# EAGLE board PCB (EAGLE 9.7.0)
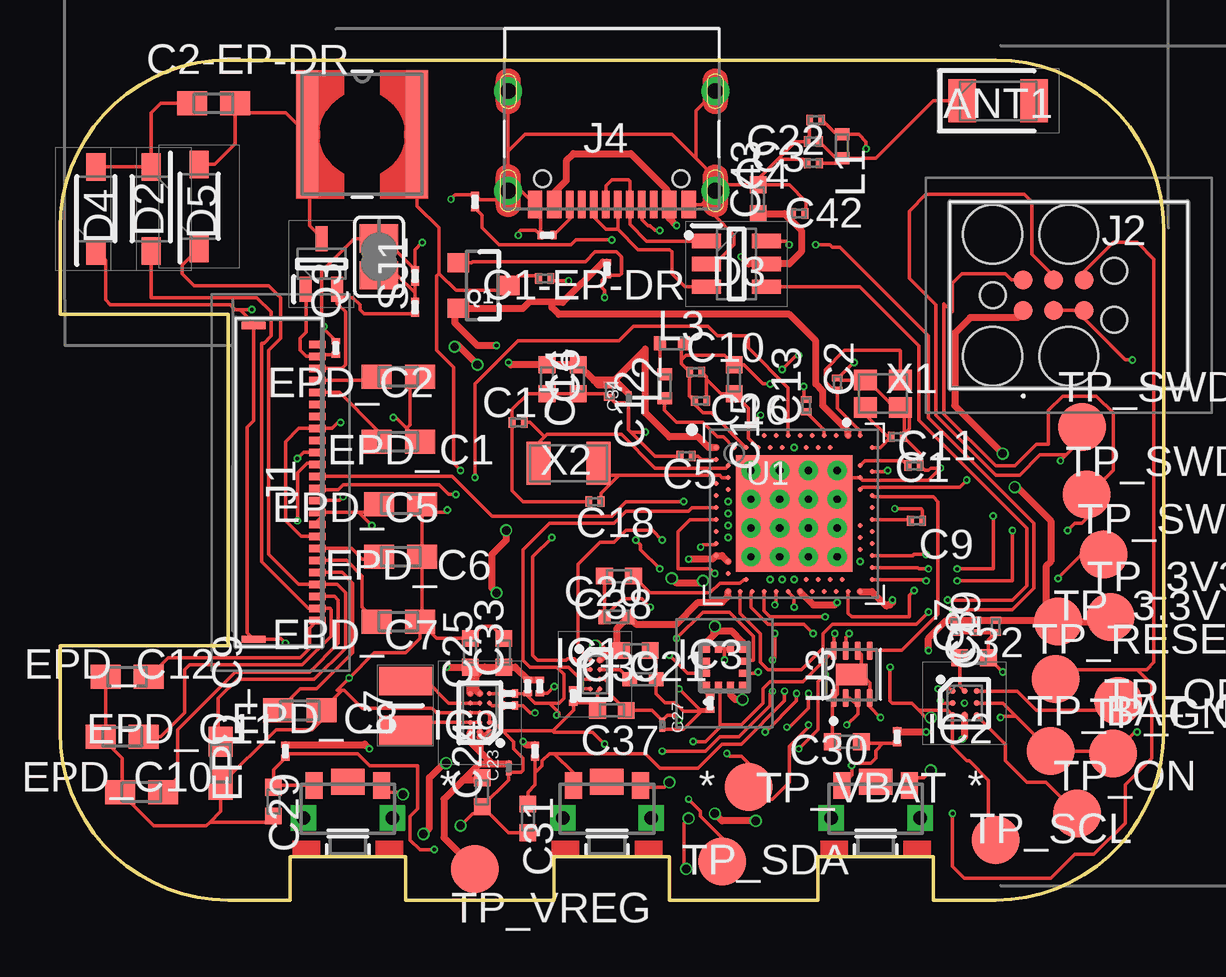
[diagram p0: board, top side]
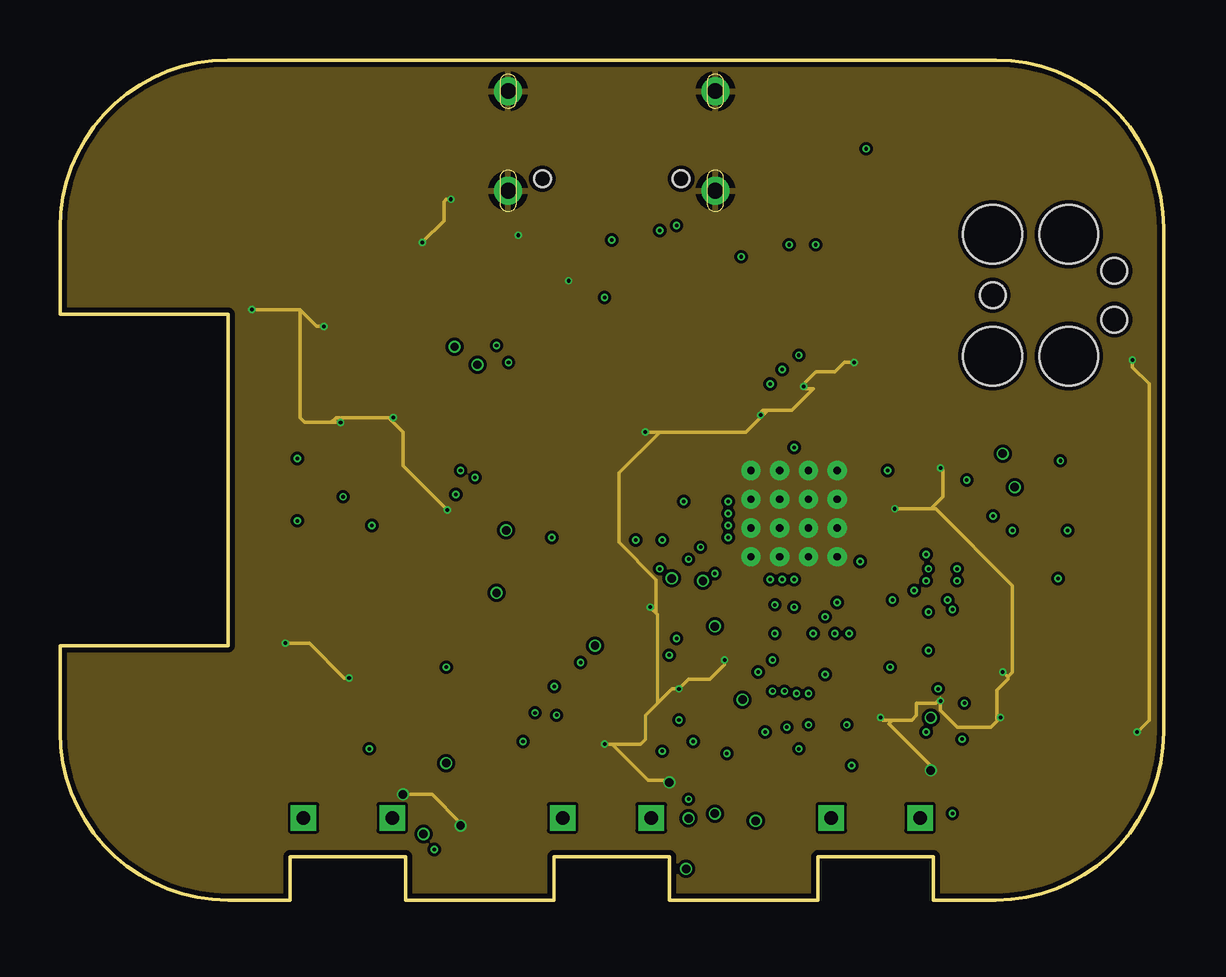
[diagram p1: board, inner layer Route2]
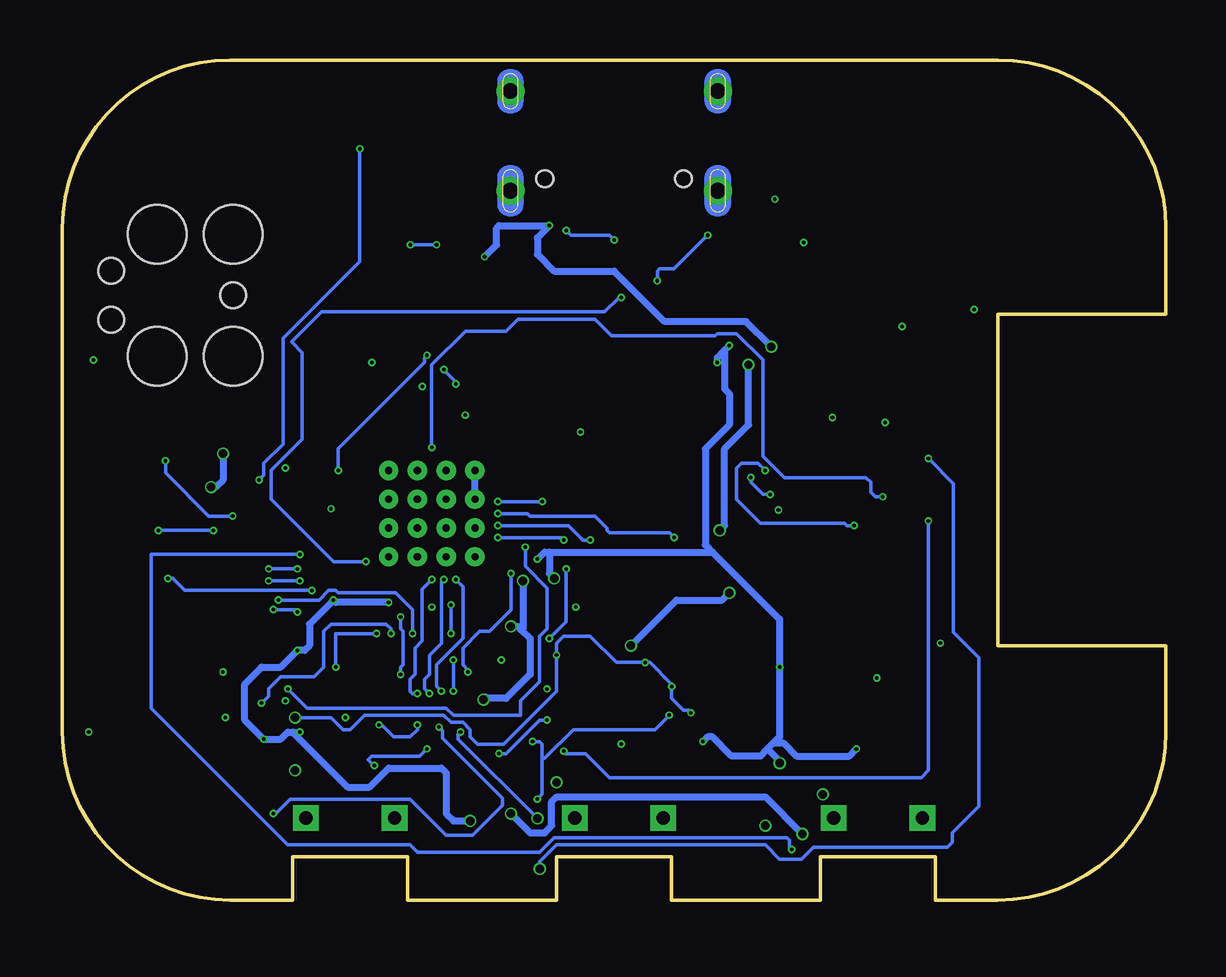
[diagram p2: board, bottom side, seen from below]

Size 46 x 35 mm. Coordinates in mm from the lower left corner, seen from the top.
Outline: 39,0 36.4,0 36.4,1.8 31.6,1.8 31.6,0 25.4,0 25.4,1.8 20.6,1.8 20.6,0 14.4,0 14.4,1.8 9.6,1.8 9.6,0 7,0 arc-90 0,7 0,10.6 7,10.6 7,24.4 0,24.4 0,28 arc-90 7,35 39,35 arc-90 46,28 46,7 arc-90 39,0
Copper layers (1+2*15+16): Top 0.035mm / dielectric 1.6mm / Route2 0.035mm / dielectric 0.15mm / Route15 0.035mm / dielectric 0.2mm / Bottom 0.035mm
Design rules "jlcpcb-2layers.dru *": minimum track width 5mil, minimum drill 0.15mm, track to track 5mil, track to pad 5mil, pad to pad 5mil, via to via 5mil, smd to smd 5mil, copper to edge 0.2mm, drill to drill 6mil, minimum pad ring 10mil, minimum via ring 3mil, stop-mask expansion 4mil, vias tented up to drill 0mil, thermal gap 10mil

## Footprints (pad centres in the part's own frame; a part is rotated, then mirrored left to right if it is on the bottom)
2450AT18B100E_ANTC3216X140N = smd 1.15 x 1.8: 1 -1.5,0; 2 1.5,0
NORDIC_NRF_3_RESC0201_L = smd 0.28 x 0.43: 1 -0.255,0; 2 0.255,0
NORDIC_NRF_3_RESC0603_M = smd 1.25 x 1: 1 -0.9,0; 2 0.9,0
NORDIC_NRF_3_RESC0402_M = smd 0.7 x 0.7: 1 -0.6,0; 2 0.6,0
GRM011R60J152KE01L_2_CAPC0201X13N = smd 0.22 x 0.23: 1 -0.185,0; 2 0.185,0
NORDIC_NRF_3_RESC0402_L = smd 0.5 x 0.6: 1 -0.5,0; 2 0.5,0
NORDIC_NRF_3_RESC0402_N = smd 0.6 x 0.6: 1 -0.55,0; 2 0.55,0
ESP32_C6_LIBRARY_5_SOD3716X135N = smd 1.15 x 0.8: 1 -1.75,0; 2 1.75,0
ESP32_C6_LIBRARY_3_SOT95P280X145-6N = smd 1.2 x 0.6: 1 -1.25,0.95; 2 -1.25,0; 3 -1.25,-0.95; 4 1.25,-0.95; 5 1.25,0; 6 1.25,0.95
BQ25180YBGR_BGA8C40P2X4_100X155X50 = smd 0.2 x 0.2: A1 -0.2,0.6; A2 0.2,0.6; B1 -0.2,0.2; B2 0.2,0.2; C1 -0.2,-0.2; C2 0.2,-0.2; D1 -0.2,-0.6; D2 0.2,-0.6
DRV2605YZFR_BGA9C50P3X3_144X144X62 = smd 0.25 x 0.25: A1 -0.5,0.5; A2 0,0.5; A3 0.5,0.5; B1 -0.5,0; B2 0,0; B3 0.5,0; C1 -0.5,-0.5; C2 0,-0.5; C3 0.5,-0.5
BMA423_BMA423 = smd 0.3 x 0.35: 1 -0.75,-0.775; 2 -0.25,-0.775; 3 0.25,-0.775; 4 0.75,-0.775; 7 0.75,0.775; 8 0.25,0.775; 9 -0.25,0.775; 10 -0.75,0.775 | smd 0.35 x 0.3: 5 0.775,-0.25; 6 0.775,0.25; 11 -0.775,0.25; 12 -0.775,-0.25
RT6160AWSC_BGA15C40P3X5_140X230X60 = smd 0.216 x 0.216: A1 -0.4,0.8; A2 0,0.8; A3 0.4,0.8; B1 -0.4,0.4; B2 0,0.4; B3 0.4,0.4; C1 -0.4,0; C2 0,0; C3 0.4,0; D1 -0.4,-0.4; D2 0,-0.4; D3 0.4,-0.4; E1 -0.4,-0.8; E2 0,-0.8; E3 0.4,-0.8
503480-2400_5034802400 = smd 0.3 x 0.7: 1 -5.75,1.525; 2 -5.25,1.525; 3 -4.75,1.525; 4 -4.25,1.525; 5 -3.75,1.525; 6 -3.25,1.525; 7 -2.75,1.525; 8 -2.25,1.525; 9 -1.75,1.525; 10 -1.25,1.525; 11 -0.75,1.525; 12 -0.25,1.525; 13 0.25,1.525; 14 0.75,1.525; 15 1.25,1.525; 16 1.75,1.525; 17 2.25,1.525; 18 2.75,1.525; 19 3.25,1.525; 20 3.75,1.525; 21 4.25,1.525; 22 4.75,1.525; 23 5.25,1.525; 24 5.75,1.525 | smd 0.3 x 1: MP1 -6.54,-1.125; MP2 6.54,-1.125
TC2030-IDC_TC2030IDC = smd 0.783 x 0.783: 1 -0.953,-0.635; 2 -0.953,0.635; 3 0.317,-0.635; 4 0.317,0.635; 5 1.588,-0.635; 6 1.588,0.635 | hole 2.451: -2.223,-2.54; -2.223,2.54; 0.952,-2.54; 0.952,2.54 | hole 1.067: -2.223,0; 2.857,-1.016; 2.857,1.016
KH-TYPE-C-16P_KINGHELM_KH-TYPE-C-16P = smd 0.6 x 1.15: A1_B12 -3.2,4.725; A4_B9 -2.4,4.725; A9_B4 2.4,4.725; A12_B1 3.2,4.725 | smd 0.3 x 1.15: A5 -1.25,4.725; A6 -0.25,4.725; A7 0.25,4.725; A8 1.25,4.725; B5 1.75,4.725; B6 0.75,4.725; B7 -0.75,4.725; B8 -1.75,4.725 | drill 0.65 pad 1.05: SH1 -4.32,0; SH2 4.32,0; SH3 -4.32,4.15; SH4 4.32,4.15 | hole 0.7: -2.89,3.65; 2.89,3.65
NORDIC_NRF_2_RESC0402_L = smd 0.5 x 0.6: 1 -0.5,0; 2 0.5,0
ESP32_C6_LIBRARY_2_IND_4828-WE-TPC_WRE = smd 0.9 x 5.3: 1 -2.286,0; 2 2.286,0
MLP2016SR47MT0S1_INDC2016X100N = smd 1.2 x 2.2: 1 -1.028,0; 2 1.028,0
ESP32_C6_LIBRARY_4_ESP32_C6_LIBRARY_4_ESP32_C6_LIBRARY_4_ESP32_C6_LIBRARY_4_ESP32_WROVER_SPARKFUN-DISCRETESEMI_SOT23-3 = smd 0.8 x 0.9: 1 -0.95,-1; 2 0.95,-1; 3 0,1.1
ESP32_C6_LIBRARY_6_SOT65P210X110-3N = smd 1.05 x 0.5: 1 -1.05,0.65; 2 -1.05,-0.65; 3 1.05,0
ERA-1AEB3401C_0201 = smd 0.35 x 0.25: 1 0,0.275; 2 0,-0.275
ESP32_C6_LIBRARY_7_JUMPER_SJ = smd 1.168 x 1.6: 1 -0.762,0; 2 0.762,0
2025-10-22_07-23-44_LIBRARY_SW_EVP-AKE31A_PAN = smd 0.711 x 1.092: 1 -1.4,-0.972; 2 1.4,-0.972 | drill 0.559 pad 0.914 square: 3 -1.848,0.381; 4 1.848,0.381 | smd 1.397 x 1.092: 5 0,-1.124
HECTOR_WATCH_1_TP20R = smd 2 x 2: TP 0,0
NORDIC_NRF_4_AQFN50P700X700X85_HS-74N = smd 4.85 x 4.85: P$74 0,0 | drill 0.3 pad 0.6: P$75 -1.8,1.8; P$76 -0.6,1.8; P$77 0.6,1.8; P$78 1.8,1.8; P$79 -1.8,0.6; P$80 -0.6,0.6; P$81 0.6,0.6; P$82 1.8,0.6; P$83 -1.8,-0.6; P$84 -0.6,-0.6; P$85 0.6,-0.6; P$86 1.8,-0.6; P$87 -1.8,-1.8; P$88 -0.6,-1.8; P$89 0.6,-1.8; P$90 1.8,-1.8 | smd 0.2 x 0.2: P$A8 -1.25,3.25; P$A10 -0.75,3.25; P$A12 -0.25,3.25; P$A14 0.25,3.25; P$A16 0.75,3.25; P$A18 1.25,3.25; P$A20 1.75,3.25; P$A22 2.25,3.25; P$A23 2.75,3.25; P$AA24 3.25,-2.25; P$AB2 -2.75,-2.5; P$AC5 -2,-2.75; P$AC9 -1,-2.75; P$AC11 -0.5,-2.75; P$AC13 0,-2.75; P$AC15 0.5,-2.75; P$AC17 1,-2.75; P$AC19 1.5,-2.75; P$AC21 2,-2.75; P$AC24 3.25,-2.75; P$AD2 -2.75,-3.25; P$AD4 -2.25,-3.25; P$AD6 -1.75,-3.25; P$AD8 -1.25,-3.25; P$AD10 -0.75,-3.25; P$AD12 -0.25,-3.25; P$AD14 0.25,-3.25; P$AD16 0.75,-3.25; P$AD18 1.25,-3.25; P$AD20 1.75,-3.25; P$AD22 2.25,-3.25; P$AD23 2.75,-3.25; P$B1 -3.25,2.75; P$B3 -2.5,2.75; P$B5 -2,2.75; P$B7 -1.5,2.75; P$B9 -1,2.75; P$B11 -0.5,2.75; P$B13 0,2.75; P$B15 0.5,2.75; P$B17 1,2.75; P$B19 1.5,2.75; P$B24 3.25,2.75; P$C1 -3.25,2.25; P$D2 -2.75,2; P$D23 2.75,2; P$E24 3.25,1.75; P$F2 -2.75,1.5; P$F23 2.75,1.5; P$G1 -3.25,1.25; P$H2 -2.75,1; P$H23 2.75,1; P$J1 -3.25,0.75; P$J24 3.25,0.75; P$K2 -2.75,0.5; P$L1 -3.25,0.25; P$L24 3.25,0.25; P$M2 -2.75,0; P$N1 -3.25,-0.25; P$N24 3.25,-0.25; P$P2 -2.75,-0.5; P$P23 2.75,-0.5; P$R1 -3.25,-0.75; P$R24 3.25,-0.75; P$T2 -2.75,-1; P$T23 2.75,-1; P$U1 -3.25,-1.25; P$U24 3.25,-1.25; P$V23 2.75,-1.5; P$W1 -3.25,-1.75; P$W24 3.25,-1.75; P$Y2 -2.75,-2; P$Y23 2.75,-2
ESP32_C6_LIBRARY_SON50P200X200X80-9N = smd 0.76 x 0.27: 1 -0.985,0.75; 2 -0.985,0.25; 3 -0.985,-0.25; 4 -0.985,-0.75; 5 0.985,-0.75; 6 0.985,-0.25; 7 0.985,0.25; 8 0.985,0.75 | smd 0.9 x 1.3: 9 0,0
NORDIC_NRF_BT-XTAL_2016_N = smd 0.95 x 0.85: 1 -0.725,-0.575; 2 0.725,-0.575; 3 0.725,0.575; 4 -0.725,0.575
NORDIC_NRF_1_XTAL_3215_N = smd 1 x 1.8: 1 -1.25,0; 2 1.25,0

## Placement (x,y rotation side)
ANT1  2450AT18B100E  [2450AT18B100E_ANTC3216X140N]  39.1,33.3 0 top
C1  12pF  [NORDIC_NRF_3_RESC0201_L]  34.9,19.3 0 top
C1-EP-DR  10uF  [NORDIC_NRF_3_RESC0201_L]  20.2,25.9 0 top
C2  12pF  [NORDIC_NRF_3_RESC0201_L]  32.4,21.5 90 top
C2-EP-DR  4.7uF/25V  [NORDIC_NRF_3_RESC0603_M]  6.4,33.2 0 top
C3  1pF  [NORDIC_NRF_3_RESC0201_L]  31.5,32.5 180 top
C4  1pF  [NORDIC_NRF_3_RESC0201_L]  31.4,30.7 180 top
C5  100nF  [NORDIC_NRF_3_RESC0201_L]  26.1,18.5 180 top
C6  4.7uF  [NORDIC_NRF_3_RESC0402_M]  20.3,21.7 270 top
C7  100nF  [NORDIC_NRF_3_RESC0201_L]  37.3,11.4 270 top
C8  100nF  [NORDIC_NRF_3_RESC0201_L]  39,11.4 270 top
C9  820pF  [NORDIC_NRF_3_RESC0201_L]  35.7,15.8 0 top
C10  N.C.  [NORDIC_NRF_3_RESC0201_L]  26.5,22 0 top
C11  100pF  [NORDIC_NRF_3_RESC0201_L]  35.6,18.1 0 top
C12  100nF  [NORDIC_NRF_3_RESC0201_L]  22.9,21.2 270 top
C13  N.C.  [NORDIC_NRF_3_RESC0201_L]  31.1,20.6 90 top
C14  4.7uF  [NORDIC_NRF_3_RESC0402_M]  21.6,21.7 270 top
C15  1.0uF  [NORDIC_NRF_3_RESC0402_M]  28.1,21.7 270 top
C16  47nF  [NORDIC_NRF_3_RESC0201_L]  26.7,20.8 0 top
C17  12pF  [NORDIC_NRF_3_RESC0201_L]  19.1,19.9 0 top
C18  12pF  [NORDIC_NRF_3_RESC0201_L]  22.3,16.6 0 top
C19  100nF  [NORDIC_NRF_3_RESC0201_L]  38.2,11.4 270 top
C20  4.7uF  [NORDIC_NRF_3_RESC0402_M]  23.3,13.5 180 top
C21  4.7uF  [NORDIC_NRF_3_RESC0402_M]  24,10.4 0 top
C22  N.C.  [NORDIC_NRF_3_RESC0201_L]  31.4,31.6 180 top
C23  0.1uF  [GRM011R60J152KE01L_2_CAPC0201X13N]  18.7,5.5 90 top
C24  10uF  [NORDIC_NRF_3_RESC0402_M]  17.6,4.5 90 top
C25  22uF  [NORDIC_NRF_3_RESC0402_M]  17.1,10.3 90 top
C27  0.1uF  [GRM011R60J152KE01L_2_CAPC0201X13N]  25.1,7.3 90 top
C29  1uF  [NORDIC_NRF_3_RESC0402_M]  8.9,4.1 270 top
C30  1uF  [NORDIC_NRF_3_RESC0402_M]  32.8,6.6 180 top
C31  1uF  [NORDIC_NRF_3_RESC0402_M]  19.5,3.4 270 top
C32  1uF  [NORDIC_NRF_3_RESC0402_M]  38.1,10.1 0 top
C33  22uF  [NORDIC_NRF_3_RESC0402_M]  18.5,10.3 90 top
C34  0.1uF  [GRM011R60J152KE01L_2_CAPC0201X13N]  23.7,20.9 90 top
C37  1uF  [NORDIC_NRF_3_RESC0402_M]  23,7.9 180 top
C38  1uF  [NORDIC_NRF_3_RESC0402_L]  23.2,11.8 0 top
C39  10uF  [NORDIC_NRF_3_RESC0402_N]  24.3,9.2 0 top
C42  0.1uF  [NORDIC_NRF_3_RESC0201_L]  30.8,28.6 0 top
C43  4.7uF  [NORDIC_NRF_3_RESC0402_M]  29.1,29.2 90 top
D2  MBR0530  [ESP32_C6_LIBRARY_5_SOD3716X135N]  3.8,28.8 270 top
D3  USBLC6-2SC6Y  [ESP32_C6_LIBRARY_3_SOT95P280X145-6N]  28.2,26.5 0 top
D4  MBR0530  [ESP32_C6_LIBRARY_5_SOD3716X135N]  1.5,28.8 90 top
D5  MBR0530  [ESP32_C6_LIBRARY_5_SOD3716X135N]  5.8,28.9 90 top
EPD_C1  1uF/50V  [NORDIC_NRF_3_RESC0603_M]  14.1,19.1 180 top
EPD_C2  1uF/50V  [NORDIC_NRF_3_RESC0603_M]  14.1,21.8 180 top
EPD_C5  01.uF/50V  [NORDIC_NRF_3_RESC0603_M]  14.2,16.5 180 top
EPD_C6  1uF/50V  [NORDIC_NRF_3_RESC0603_M]  14.2,14.3 180 top
EPD_C7  1uF/50V  [NORDIC_NRF_3_RESC0603_M]  14.1,11.6 180 top
EPD_C8  1uF/50V  [NORDIC_NRF_3_RESC0603_M]  10,7.9 180 top
EPD_C9  1uF/50V  [NORDIC_NRF_3_RESC0603_M]  6.7,5.7 90 top
EPD_C10  1uF/50V  [NORDIC_NRF_3_RESC0603_M]  3.4,4.5 0 top
EPD_C11  1uF/50V  [NORDIC_NRF_3_RESC0603_M]  2.6,6.8 0 top
EPD_C12  1uF/50V  [NORDIC_NRF_3_RESC0603_M]  2.8,9.3 0 top
IC1  BQ25180YBGR  [BQ25180YBGR_BGA8C40P2X4_100X155X50]  22.3,9.4 0 top
IC2  DRV2605YZFR  [DRV2605YZFR_BGA9C50P3X3_144X144X62]  37.7,8.2 0 top
IC3  BMA421  [BMA423_BMA423]  27.7,9.7 0 top
IC9  RT6160AWSC  [RT6160AWSC_BGA15C40P3X5_140X230X60]  17.5,7.8 180 top
J1  503480-2400  [503480-2400_5034802400]  9.2,17.4 270 top
J2  TC2030-IDC  [TC2030-IDC_TC2030IDC]  41.1,25.2 0 top
J4  KH-TYPE-C-16P  [KH-TYPE-C-16P_KINGHELM_KH-TYPE-C-16P]  23,33.7 180 top
L1  3.9nH  [NORDIC_NRF_2_RESC0402_L]  32.6,31.4 270 top
L2  100µH  [NORDIC_NRF_2_RESC0402_L]  25.2,21.4 90 top
L3  15nH  [NORDIC_NRF_2_RESC0402_L]  25.5,23.2 0 top
L5  68uH  [ESP32_C6_LIBRARY_2_IND_4828-WE-TPC_WRE]  12.6,31.9 0 top
L7  FTC252012SR47MBCA  [MLP2016SR47MT0S1_INDC2016X100N]  14.4,8.1 90 top
Q1  20V/4.2A/52mΩ/1.4W  [ESP32_C6_LIBRARY_4_ESP32_C6_LIBRARY_4_ESP32_C6_LIBRARY_4_ESP32_C6_LIBRARY_4_ESP32_WROVER_SPARKFUN-DISCRETESEMI_SOT23-3]  17.6,25.6 270 top
Q3  SI1308EDL-T1-GE3  [ESP32_C6_LIBRARY_6_SOT65P210X110-3N]  10.9,26.5 90 top
R1-EP-DR  0.47  [ERA-1AEB3401C_0201]  14.8,24.7 0 top
R1_USB  5K1  [ERA-1AEB3401C_0201]  17.3,29.1 0 top
R2  0  [ERA-1AEB3401C_0201]  18.7,8.6 270 top
R2-EP-DR  10K  [ERA-1AEB3401C_0201]  11.5,23 0 top
R2_USB  5K1  [ERA-1AEB3401C_0201]  20.3,27.7 270 top
R3  0  [ERA-1AEB3401C_0201]  27.1,8.2 180 top
R4  0  [ERA-1AEB3401C_0201]  18.7,8.1 270 top
R5  10K  [ERA-1AEB3401C_0201]  34.9,6.8 180 top
R7  10K  [ERA-1AEB3401C_0201]  9.4,6.2 180 top
R8  10K  [ERA-1AEB3401C_0201]  19.8,6.2 180 top
R9  10K  [ERA-1AEB3401C_0201]  21.4,8.5 180 top
R17  3K3  [ERA-1AEB3401C_0201]  20,8.9 0 top
R18  3K3  [ERA-1AEB3401C_0201]  19.5,8.9 0 top
R_PWR_EPD  10K  [ERA-1AEB3401C_0201]  22.8,26.3 180 top
R_TYPE_SEL  2.2  [ERA-1AEB3401C_0201]  14.8,26 0 top
SJ1  [ESP32_C6_LIBRARY_7_JUMPER_SJ]  13.3,26.8 270 top
SW_DN  2025-10-22_07-23-44_LIBRARY_EVP-AKE31ASW_EVP-AKE31A_PAN  [2025-10-22_07-23-44_LIBRARY_SW_EVP-AKE31A_PAN]  12,3.8 180 top
SW_NET  2025-10-22_07-23-44_LIBRARY_EVP-AKE31ASW_EVP-AKE31A_PAN  [2025-10-22_07-23-44_LIBRARY_SW_EVP-AKE31A_PAN]  22.8,3.8 180 top
SW_UP  2025-10-22_07-23-44_LIBRARY_EVP-AKE31ASW_EVP-AKE31A_PAN  [2025-10-22_07-23-44_LIBRARY_SW_EVP-AKE31A_PAN]  34,3.8 180 top
TP_3.3V  HECTOR_WATCH_1_TPTP20R  [HECTOR_WATCH_1_TP20R]  41.6,11.6 0 top
TP_3V3  HECTOR_WATCH_1_TPTP20R  [HECTOR_WATCH_1_TP20R]  43.8,11.8 0 top
TP_BAT_GND  HECTOR_WATCH_1_TPTP20R  [HECTOR_WATCH_1_TP20R]  41.3,6.2 0 top
TP_GND  HECTOR_WATCH_1_TPTP20R  [HECTOR_WATCH_1_TP20R]  43.9,6.1 0 top
TP_ON  HECTOR_WATCH_1_TPTP20R  [HECTOR_WATCH_1_TP20R]  42.4,3.6 0 top
TP_OP  HECTOR_WATCH_1_TPTP20R  [HECTOR_WATCH_1_TP20R]  44.1,8.3 0 top
TP_RESET  HECTOR_WATCH_1_TPTP20R  [HECTOR_WATCH_1_TP20R]  41.5,9.2 0 top
TP_SCL  HECTOR_WATCH_1_TPTP20R  [HECTOR_WATCH_1_TP20R]  39,2.5 0 top
TP_SDA  HECTOR_WATCH_1_TPTP20R  [HECTOR_WATCH_1_TP20R]  27.6,1.6 0 top
TP_SWDCLK  HECTOR_WATCH_1_TPTP20R  [HECTOR_WATCH_1_TP20R]  42.6,19.7 0 top
TP_SWDIO  HECTOR_WATCH_1_TPTP20R  [HECTOR_WATCH_1_TP20R]  42.8,16.9 0 top
TP_SWO  HECTOR_WATCH_1_TPTP20R  [HECTOR_WATCH_1_TP20R]  43.5,14.4 0 top
TP_VBAT  HECTOR_WATCH_1_TPTP20R  [HECTOR_WATCH_1_TP20R]  28.7,4.7 0 top
TP_VREG  HECTOR_WATCH_1_TPTP20R  [HECTOR_WATCH_1_TP20R]  17.3,1.3 0 top
U1  NRF52840_QF  [NORDIC_NRF_4_AQFN50P700X700X85_HS-74N]  30.6,16.1 0 top
U3  MAX17048G+T10  [ESP32_C6_LIBRARY_SON50P200X200X80-9N]  33,9.4 90 top
X1  32MHz  [NORDIC_NRF_BT-XTAL_2016_N]  34.3,21.1 0 top
X2  32.768kHz  [NORDIC_NRF_1_XTAL_3215_N]  21.2,18.2 0 top

## Library data of the parts
ANT1 = InkTime_v5; ARROW_PART_NUMBER: 2450AT18B100E; ARROW_PRICE-STOCK: https://www.arrow.com/en/products/2450at18b100e/johanson-dielectrics?utm_currency=USD&region=nac; DESCRIPTION: Antennas 2.45GHz ANTENNA; HEIGHT: 1.4mm; MANUFACTURER_NAME: JOHANSON TECHNOLOGY; MANUFACTURER_PART_NUMBER: 2450AT18B100E; MOUSER_PART_NUMBER: 609-2450AT18B100E; MOUSER_PRICE-STOCK: https://www.mouser.co.uk/ProductDetail/Johanson-Technology/2450AT18B100E?qs=yCnrNFeXz%252Bh5MFsFIXGZGA%3D%3D
C1 C1-EP-DR C2 C2-EP-DR C3-C8 C10-C22 C24 C25 C29-C33 C37-C39 C42 C43 EPD_C1 EPD_C2 EPD_C5-EPD_C12 L1-L3 R1-EP-DR R1_USB R2 R2-EP-DR R2_USB R3-R5 R7-R9 R17 R18 R_PWR_EPD R_TYPE_SEL SJ1 TP_3.3V TP_3V3 TP_BAT_GND TP_GND TP_ON TP_OP TP_RESET TP_SCL TP_SDA TP_SWDCLK TP_SWDIO TP_SWO TP_VBAT TP_VREG U1 X1 X2 = InkTime_v5
C9 = InkTime_v5; MAXTEMP: N.C.
C23 C27 C34 = InkTime_v5; AVAILABILITY: In Stock; CHECK_PRICES: https://www.snapeda.com/parts/GRM011R60J152KE01L/Murata/view-part/?ref=eda; DESCRIPTION: SMD Capacitor X5R(EIA) with Capacitance: 1500pF Tol. 10%. Rated Voltage: 6.3Vdc; MF: Murata; MP: GRM011R60J152KE01L; PACKAGE: 0201 Murata; PRICE: None; SNAPEDA_LINK: https://www.snapeda.com/parts/GRM011R60J152KE01L/Murata/view-part/?ref=snap
D2 D4 D5 = InkTime_v5; AVAILABILITY: In Stock; CHECK_PRICES: https://www.snapeda.com/parts/MBR0530/Onsemi/view-part/?ref=eda; DESCRIPTION: Diode Schottky 30 V 500mA Surface Mount SOD-123; MF: ON Semiconductor; MP: MBR0530; PACKAGE: SOD-123-2 ON Semiconductor; PRICE: None; PURCHASE-URL: https://www.snapeda.com/api/url_track_click_mouser/?unipart_id=179458&manufacturer=ON Semiconductor&part_name=MBR0530&search_term=None; SNAPEDA_LINK: https://www.snapeda.com/parts/MBR0530/Onsemi/view-part/?ref=snap
D3 = InkTime_v5; AVAILABILITY: In Stock; CHECK_PRICES: https://www.snapeda.com/parts/USBLC6-2SC6Y/STMicroelectronics/view-part/?ref=eda; DESCRIPTION: 17V Clamp 5A (8/20µs) Ipp Tvs Diode Surface Mount SOT-23-6; MF: STMicroelectronics; MP: USBLC6-2SC6Y; PACKAGE: SOT-23-6 STMicroelectronics; PRICE: None; SNAPEDA_LINK: https://www.snapeda.com/parts/USBLC6-2SC6Y/STMicroelectronics/view-part/?ref=snap
IC1 = InkTime_v5; ARROW_PART_NUMBER: BQ25180YBGR; ARROW_PRICE-STOCK: https://www.arrow.com/en/products/bq25180ybgr/texas-instruments?utm_currency=USD&region=nac; DESCRIPTION: Charger IC Lithium Ion/Polymer, Lithium Iron Phosphate 8-DSBGA (1.6x1.1); HEIGHT: 0.5mm; MANUFACTURER_NAME: Texas Instruments; MANUFACTURER_PART_NUMBER: BQ25180YBGR; MOUSER_PART_NUMBER: 595-BQ25180YBGR; MOUSER_PRICE-STOCK: https://www.mouser.co.uk/ProductDetail/Texas-Instruments/BQ25180YBGR?qs=doiCPypUmgEWjAK%252BJAX6Tw%3D%3D
IC2 = InkTime_v5; ARROW_PART_NUMBER: DRV2605YZFR; ARROW_PRICE-STOCK: https://www.arrow.com/en/products/drv2605yzfr/texas-instruments?region=nac; DESCRIPTION: Haptic Driver for ERM/LRA with Built-In Library and Smart Loop Architecture; HEIGHT: 0.625mm; MANUFACTURER_NAME: Texas Instruments; MANUFACTURER_PART_NUMBER: DRV2605YZFR
IC3 = InkTime_v5; ARROW_PART_NUMBER: BMA423; ARROW_PRICE-STOCK: https://www.arrow.com/en/products/bma423/bosch; DESCRIPTION: Accelerometers Triaxial low-g 12bit Acceleration Sensor; HEIGHT: 1mm; MANUFACTURER_NAME: BOSCH; MANUFACTURER_PART_NUMBER: BMA423; MOUSER_PART_NUMBER: 262-BMA423; MOUSER_PRICE-STOCK: https://www.mouser.co.uk/ProductDetail/Bosch-Sensortec/BMA423?qs=HXFqYaX1Q2xC%252BSgeGoX3mg%3D%3D
IC9 = InkTime_v5; DESCRIPTION: Buck-Boost Regulator Positive Output Step-Up/Step-Down I2C DC-DC Controller IC 15-WL-CSP (BSC) (1.4x2.3); HEIGHT: 0.6mm; MANUFACTURER_NAME: RICHTEK; MANUFACTURER_PART_NUMBER: RT6160AWSC; MOUSER_PART_NUMBER: 835-RT6160AWSC; MOUSER_PRICE-STOCK: https://www.mouser.co.uk/ProductDetail/Richtek/RT6160AWSC?qs=amGC7iS6iy%2FLd9PSoixZXQ%3D%3D
J1 = InkTime_v5; DESCRIPTION: FFC & FPC Connectors 0.5mm FPC RA SMT Dual Contact 24Ckt; HEIGHT: 1.87mm; MANUFACTURER_NAME: Molex; MANUFACTURER_PART_NUMBER: 503480-2400; MOUSER_PART_NUMBER: 538-503480-2400; MOUSER_PRICE-STOCK: https://www.mouser.co.uk/ProductDetail/Molex/503480-2400?qs=OAhjpuo3Vu7efIoxFh9AOw%3D%3D
J2 = InkTime_v5; DESCRIPTION: CABLE ADAPTER 6 POS; HEIGHT: 19mm; MANUFACTURER_NAME: Tag Connect; MANUFACTURER_PART_NUMBER: TC2030-IDC
J4 = InkTime_v5; AVAILABILITY: Not in stock; CHECK_PRICES: https://www.snapeda.com/parts/KH-TYPE-C-16P/Kinghelm/view-part/?ref=eda; MF: kinghelm; MP: KH-TYPE-C-16P; PACKAGE: None; PRICE: None; SNAPEDA_LINK: https://www.snapeda.com/parts/KH-TYPE-C-16P/Kinghelm/view-part/?ref=snap
L5 = InkTime_v5; COPYRIGHT: Copyright (C) 2024 Ultra Librarian. All rights reserved.; MANUFACTURER_PART_NUMBER: 744043680; MFR_NAME: Wurth Electronics
L7 = InkTime_v5; DESCRIPTION: SMD / SMT Inductors (Coils), L=0.47?H, L x W x T :; HEIGHT: 1mm; JLCPCB: https://jlcpcb.com/partdetail/6763488-FTC252012SR47MBCA/C5832368; MANUFACTURER_NAME: TDK; MANUFACTURER_PART_NUMBER: FTC252012SR47MBCA
Q1 = InkTime_v5; DMG2305UX-7: 0; PROD_ID: TRAN-14388
Q3 = InkTime_v5; AVAILABILITY: In Stock; CHECK_PRICES: https://www.snapeda.com/parts/SI1308EDL-T1-GE3/Vishay+Siliconix/view-part/?ref=eda; DESCRIPTION: Si1308EDL-T1-GE3 N-channel MOSFET Transistor, 1.5 A, 30 V, 3-Pin SC-70 | Siliconix / Vishay SI1308EDL-T1-GE3; MF: Vishay Siliconix; MP: SI1308EDL-T1-GE3; PACKAGE: SOT-323 Vishay Semiconductor; PRICE: None; PURCHASE-URL: https://www.snapeda.com/api/url_track_click_mouser/?unipart_id=274603&manufacturer=Vishay Siliconix&part_name=SI1308EDL-T1-GE3&search_term=None; SNAPEDA_LINK: https://www.snapeda.com/parts/SI1308EDL-T1-GE3/Vishay+Siliconix/view-part/?ref=snap
SW_DN SW_NET SW_UP = InkTime_v5_new; COPYRIGHT: Copyright (C) 2025 Ultra Librarian. All rights reserved.; DIGI-KEY_PART_NUMBER_1: P123437TR-ND; DIGI-KEY_PART_NUMBER_2: P123437CT-ND; DIGI-KEY_PART_NUMBER_3: P123437DKR-ND; MANUFACTURER_NAME: Panasonic; MANUFACTURER_PART_NUMBER: EVP-AKE31A
U3 = InkTime_v5; AVAILABILITY: In Stock; CHECK_PRICES: https://www.snapeda.com/parts/MAX17048G+T10/Analog+Devices/view-part/?ref=eda; DESCRIPTION: 3µA 1-Cell/2-Cell Fuel Gauge with ModelGauge; MF: Analog Devices; MP: MAX17048G+T10; PACKAGE: TDFN-8 Maxim; PRICE: None; PURCHASE-URL: https://www.snapeda.com/api/url_track_click_mouser/?unipart_id=329239&manufacturer=Analog Devices&part_name=MAX17048G+T10&search_term=None; SNAPEDA_LINK: https://www.snapeda.com/parts/MAX17048G+T10/Analog+Devices/view-part/?ref=snap

## Nets
3V3: C6.1 C7.1 C8.1 C12.1 C14.1 C19.1 C25.1 C33.1 C34.2 IC2.C2 IC3.3 IC3.7 IC3.10 IC9.E2 IC9.E3 J2.1 Q1.2 R5.2 R7.2 R8.2 R17.1 R18.1 R_PWR_EPD.2 TP_3.3V.TP TP_3V3.TP U1.P$A22 U1.P$AD14 U1.P$AD23 U1.P$B1 U1.P$W1 U1.P$Y2
ALERT: U1.P$J24 U3.5
D+: D3.4 U1.P$AD6
D-: D3.6 U1.P$AD4
DN: D3.1 J4.A7 J4.B7
DP: D3.3 J4.A6 J4.B6
EPD_3V3: C1-EP-DR.1 EPD_C5.2 J1.15 J1.16 L5.2 Q1.3
EPD_BUSY: J1.9
EPD_CS: J1.12 U1.P$K2
EPD_DC: J1.11 U1.P$AD10
EPD_RST: J1.10 U1.P$AC11
EPS_BUSY: U1.P$AD12
GDR: J1.2 Q3.1 R2-EP-DR.2
GND: C1-EP-DR.2 C1.2 C2.2 C3.2 C4.2 C5.2 C6.2 C7.2 C8.2 C9.2 C10.2 C11.2 C12.2 C13.2 C14.2 C15.2 C16.2 C17.1 C18.1 C19.2 C20.2 C21.2 C22.2 C23.1 C24.1 C25.2 C27.1 C29.2 C30.2 C31.2 C32.2 C33.2 C34.1 C37.2 C38.1 C39.2 C42.2 C43.2 D3.2 D4.1 EPD_C1.1 EPD_C2.1 EPD_C5.1 EPD_C6.1 EPD_C7.1 EPD_C8.1 EPD_C9.1 EPD_C10.1 EPD_C11.1 EPD_C12.1 IC1.D2 IC2.B1 IC2.B3 IC3.8 IC3.9 IC9.B1 IC9.C1 IC9.C2 IC9.C3 J1.8 J1.17 J1.MP1 J1.MP2 J2.3 J2.5 J4.A1_B12 J4.A12_B1 J4.SH1 J4.SH2 J4.SH3 J4.SH4 R1_USB.1 R2-EP-DR.1 R2_USB.2 R3.1 R9.1 R_TYPE_SEL.1 SJ1.1 SW_DN.1 SW_NET.1 SW_UP.1 TP_BAT_GND.TP TP_GND.TP U1.P$74 U1.P$75 U1.P$76 U1.P$77 U1.P$78 U1.P$79 U1.P$80 U1.P$81 U1.P$82 U1.P$83 U1.P$84 U1.P$85 U1.P$86 U1.P$87 U1.P$88 U1.P$89 U1.P$90 U1.P$B7 U1.P$F23 U3.1 U3.4 U3.6 U3.9 X1.2 X1.4
HAPTIC_EN: IC2.A1 U1.P$U1
IMU_INT1: IC3.5 U1.P$N1
IMU_INT2: IC3.6 U1.P$P2
LX1: IC9.B2 IC9.B3 L7.1
LX2: IC9.D2 IC9.D3 L7.2
MOSI: J1.14 U1.P$B13
N$1: C39.1 IC1.B2
N$2: C5.1 U1.P$C1
N$3: IC9.D1 R4.2
N$4: IC9.E1 R2.2
N$5: C17.2 U1.P$D2 X2.1
N$6: IC1.D1 R9.2
N$7: ANT1.1 C4.1 C22.1 L1.2
N$8: EPD_C8.2 J1.20
N$9: L2.1 U1.P$B3
N$10: IC3.1 R3.2
N$11: C10.1 C15.1 C16.1 L3.2 U1.P$B5 U1.P$E24
N$12: L2.2 L3.1
N$13: C18.2 U1.P$F2 X2.2
N$14: C2-EP-DR.2 D5.2 L5.1 Q3.3
N$15: C2-EP-DR.1 D2.1 D4.2
N$16: EPD_C2.2 J1.4
N$17: R1-EP-DR.1 R_TYPE_SEL.2 SJ1.2
N$18: EPD_C12.2 J1.24
N$19: C9.1 U1.P$N24
N$20: EPD_C1.2 J1.5
N$21: C20.1 U1.P$AC5
N$22: J4.A5 R1_USB.2
N$23: C3.1 L1.1 U1.P$H23
N$25: EPD_C10.2 J1.22
N$26: C11.1 U1.P$D23
N$27: C1.1 U1.P$B24 X1.1
N$28: C2.1 U1.P$A23 X1.3
N$29: C32.1 IC2.A2
N$31: C13.1 U1.P$A18
N$34: J4.B5 R2_USB.1
N$36: EPD_C6.2 J1.18
N$37: EPD_C7.2 J1.19
OUT+: IC2.A3 TP_OP.TP
OUT-: IC2.C3 TP_ON.TP
P0.04: U1.P$J1
P0.09: U1.P$L24
P0.13: C30.1 R5.1 SW_UP.2 U1.P$AD8
P0.14: C31.1 R8.1 SW_NET.2 U1.P$AC9
P0.19: U1.P$AC15
P0.20: U1.P$AD16
P0.21: U1.P$AC17
P0.22: U1.P$AD18
P0.23: U1.P$AC19
P0.24: U1.P$AD20
P0.25: U1.P$AC21
P0.26: U1.P$G1
P0.27: U1.P$H2
P0.28: U1.P$B11
P0.29: U1.P$A10
P0.30: U1.P$B9
P0.31: U1.P$A8
P1.01: Q1.1 R_PWR_EPD.1 U1.P$Y23
P1.02: C29.1 R7.1 SW_DN.2 U1.P$W24
P1.03: U1.P$V23
P1.04: U1.P$U24
P1.05: U1.P$T23
P1.06: U1.P$R24
P1.07: U1.P$P23
P1.09: U1.P$R1
P1.10: U1.P$A20
P1.11: U1.P$B19
P1.12: U1.P$B17
P1.13: U1.P$A16
P1.14: U1.P$B15
P1.15: U1.P$A14
PMIC_INT: IC1.A1 U1.P$T2
PREVGH: D5.1 EPD_C9.2 J1.21
PREVGL: D2.2 EPD_C11.2 J1.23
RESE: J1.3 Q3.2 R1-EP-DR.2
RESET: J2.6 TP_RESET.TP U1.P$AC13
SCK: J1.13 U1.P$A12
SCL: IC1.B1 IC2.C1 IC3.12 R4.1 R17.2 TP_SCL.TP U1.P$M2 U3.7
SDA: IC1.C1 IC2.B2 IC3.2 R2.1 R18.2 TP_SDA.TP U1.P$L1 U3.8
SWDCLK: J2.4 TP_SWDCLK.TP U1.P$AA24
SWDIO: J2.2 TP_SWDIO.TP U1.P$AC24
SWO: TP_SWO.TP U1.P$AD22
VBAT: C27.2 C37.1 IC1.C2 TP_VBAT.TP U3.2 U3.3
VBUS: C21.1 C38.2 C42.1 C43.1 D3.5 IC1.A2 J4.A4_B9 J4.A9_B4 U1.P$AD2
VREG: C23.2 C24.2 IC9.A1 IC9.A2 IC9.A3 TP_VREG.TP

## Tracks (layer width: path | path; a pad name or v marks a point on that pad's centre or on a via)
3V3  (via drill 0.15, 0.35)
  Top 0.3: U1.P$B1 27.05,18.85 26.6,19.3 25.4,19.3 24.4,20.3 24.4,22.96 C12.1 22.45,21.46 22.25,21.65 | 22.25,21.65 C14.1 C6.1 18.8,22.3 v18.7,22.4 | C34.2 23.13,21.65 22.25,21.65 | v18.2,23.1 17.4,23.1 16.45,24.05 16.45,24.5 Q1.2 19.3,24.65 19.58,24.93 20.5,24.91 | 20.5,24.91 20.95,24.9 22.62,26.58 R_PWR_EPD.2 | v26.2,14.2 27.2,14.2 U1.P$W1 27.6,14.35 U1.P$Y2 | v16.1,9.7 C25.1 17.7,9.7 | 17.7,9.7 C33.1 18.98,9.7 R18.1 R17.1 | 17.7,9.7 17.35,9.35 | 17.35,9.35 17.1,9.1 IC9.E3 | IC9.E2 17.35,8.75 17.35,9.35 | v19.3,6.6 19.43,6.48 R8.2 | R7.2 12.67,6.48 12.7,6.5 v12.9,6.3 | IC2.C2 37.7,6.8 v37.6,6.7 | v36.1,7 34.98,7 R5.2 | 41.55,11.66 C8.1 C19.1 C7.1 36.95,11.66 36.2,10.9 v36.2,10.4 | 41.55,11.66 TP_3.3V.TP 43.6,11.6 TP_3V3.TP | U1.P$AD23 33.85,12.85 34.45,12.25 34.5,12.3 34.6,12.3 34.7,12.4 v34.7,12.5 | U1.P$AD14 31.4,12.3 32.3,12.3 v32.4,12.4 | J2.1 40.15,24.47 39.95,24.27 37.95,24.27 37.3,23.62 37.3,20.6 v39.3,18.6 | v39.8,17.2 39.9,17.2 41.3,15.8 41.3,14.1 41.1,13.9 41.1,12.1 41.55,11.66 | U1.P$A22 32.85,19.55 31.8,20.6 31.8,21.2 31.5,21.5 31.5,23.3 30.4,24.4 20.8,24.4 20.5,24.7 20.5,24.91 | IC3.7 28.45,10.75 28,11.2 27.4,11.2 27.25,11.05 | 27.25,11.05 26.95,10.75 IC3.10 | 27.25,11.05 27.25,11.35 v27.3,11.4 | v28.45,8.35 28.15,8.35 27.95,8.55 IC3.3 | v25.5,13.4 25.7,13.2 26.7,13.2 v26.8,13.3 | v29,3.3 27.6,3.3 v27.3,3.6 | v15.15,2.75 15.4,3 15.4,5.1 16,5.7 v16.1,5.7
  Bottom 0.3: v18.7,22.4 18.7,22.6 18.4,22.9 | 18.4,22.9 v18.2,23.1 | v26.2,14.2 25.9,14.5 25.7,14.5 | 25.7,14.5 18.9,14.5 | 18.9,14.5 16.1,11.7 v16.1,9.7 16.1,6.8 16.35,6.55 | 16.35,6.55 16.6,6.3 | 16.6,6.3 16.9,6 18.1,6 18.9,6.8 19.1,6.8 v19.3,6.6 | 36.4,7 36.6,7 36.9,6.7 v37.6,6.7 38.4,7.5 38.4,9 37.7,9.7 36.9,9.7 v36.2,10.4 35.9,10.4 35.7,10.6 35.7,11.5 v34.7,12.5 34.6,12.4 v32.4,12.4 | 36.4,7 v36.1,7 | 16.35,6.55 15.95,6.55 15.4,6 13.2,6 v12.9,6.3 | v39.3,18.6 39.3,17.5 39.6,17.2 v39.8,17.2 | 18.4,22.9 18.4,21.3 18.2,21.1 18.2,19.8 19.2,18.8 19.2,14.8 18.9,14.5 | v27.3,11.4 27,11.4 26.85,11.25 | 26.85,11.25 26.5,10.9 26.5,9.4 27.5,8.4 28.3,8.4 28.35,8.45 v28.45,8.35 | 25.7,14.5 25.7,13.6 v25.5,13.4 | v26.8,13.3 26.8,11.3 26.85,11.25 | 36.4,7 34.1,4.7 33.2,4.7 32.4,5.5 30.2,5.5 30,5.3 30,3.6 29.7,3.3 v29,3.3 | v27.3,3.6 26.5,2.8 25.9,2.8 25.6,3.1 25.6,4.1 25.4,4.3 16.7,4.3 v15.15,2.75 | v16.1,5.7 16.1,5.8 16.6,6.3
ALERT
  Top 0.15: U1.P$J24 33.9,16.8 36.4,16.8 36.6,16.6 36.6,11.9 35.1,10.4 33.77,10.4 U3.5
D+  (via drill 0.15)
  Top 0.15: D3.4 33.35,25.55 35.8,23.1 35.8,20 40.3,15.5 40.3,13.1 39.7,12.5 v37,12.5 | v31.4,11.1 31,11.5 29.5,11.5 28.8,12.2 28.8,12.8 U1.P$AD6
  Bottom 0.15: v31.4,11.1 31.4,12.1 32.1,12.8 34.5,12.8 34.6,12.9 34.9,12.9 35.3,12.5 v37,12.5
D-  (via drill 0.15)
  Top 0.15: D3.6 30.25,27.45 v30.4,27.3 | U1.P$AD4 28.35,11.95 29.2,11.1 29.2,9.9 29.5,9.6 30.9,9.6 31.8,10.5 31.8,11.1 32.2,11.5 35.7,11.5 v36.2,12 | v37.2,12.1 39.7,12.1 40.6,13 40.6,15.7 36.2,20.1 36.2,23.5 32.5,27.2 32.2,27.2 32.1,27.3 v31.5,27.3
  Bottom 0.15: v30.4,27.3 v31.5,27.3 | v36.2,12 36.3,12.1 v37.2,12.1
DN
  Top 0.15: D3.1 24.45,27.45 23.75,28.15 J4.B7 23.75,29.95 23.7,30 23,30 22.75,29.75 J4.A7
DP
  Top 0.15: D3.3 26.05,25.55 25.5,26.1 25.5,27 25.4,27.1 24.1,27.1 23.25,27.95 | J4.A6 23.25,27.95 | 23.25,27.95 22.75,27.95 22.25,28.45 J4.B6
EPD_3V3  (via drill 0.15)
  Top 0.15: J1.15 11.1,16.15 | 11.1,16.15 12.45,16.15 | 12.45,16.15 12.95,16.15 EPD_C5.2 | J1.16 10.72,15.78 11.1,16.15 | L5.2 14.89,28.91 15.8,28 15.8,26.1 | 15.8,26.1 16.5,25.4 18.5,25.4 Q1.3 19.1,26 19.84,26 C1-EP-DR.1 | 15.8,26.1 15.7,26 15.7,22.9 16.4,22.2 16.4,18.2 v16.7,17.9 | v13,15.6 12.45,16.15
  Bottom 0.15: v16.7,17.9 17,18.2 17.7,18.2 17.9,18 17.9,16.7 16.9,15.7 13.4,15.7 13.3,15.6 v13,15.6
EPD_CS  (via drill 0.15)
  Top 0.15: J1.12 16.35,17.65 18,16 23,16 23.6,16.6 v26,16.6
  Bottom 0.15: U1.P$K2 v26,16.6
  other vias: 27.85,16.6
EPD_DC  (via drill 0.15)
  Top 0.15: U1.P$AD10 29.85,12.35 v29.8,12.3 | J1.11 10.67,18.2 10.3,18.2 9.9,17.8 v9.9,15.8 | v25.1,6.2 26.9,6.2 27.5,6.8 28.3,6.8 29.6,8.1 29.6,8.6 v29.7,8.7 | v29.8,11.1 29.8,10.1 v29.7,10
  Bottom 0.15: v9.9,15.8 9.9,5.4 10.2,5.1 23.2,5.1 24.2,6.1 25,6.1 v25.1,6.2 | v29.7,8.7 v29.7,10 | v29.8,11.1 v29.8,12.3
EPD_RST  (via drill 0.15, 0.35)
  Top 0.15: v30.7,8.6 30.7,8.3 v29.4,7 | v9.9,18.4 10.15,18.65 J1.10 | v26.1,1.3 26,1.4 26,3.2 v26.2,3.4
  Bottom 0.15: U1.P$AC11 30.2,13.25 30.2,10.7 30.7,10.2 30.7,9.4 30.9,9.2 30.9,8.8 v30.7,8.6 | v29.4,7 29.5,6.9 29.5,6.7 v26.2,3.4 | v9.9,18.4 8.85,17.35 8.85,11.15 7.8,10.1 7.8,3.9 8.9,2.8 8.9,2.4 9.1,2.2 14.7,2.2 15.2,1.7 16.1,1.7 16.7,2.3 25.4,2.3 26.1,1.6 v26.1,1.3
  other vias: 30.1,13.35
EPS_BUSY  (via drill 0.15)
  Top 0.15: U1.P$AD12 30.6,12.6 v30.6,12.2
GDR
  Top 0.15: Q3.1 10.25,23.65 10,23.4 10,22.9 10.25,22.65 J1.2 10.8,22.73 R2-EP-DR.2
GND  (via drill 0.15, 0.35)
  Top 0.15: D4.1 1.9,26.65 1.9,25 2.1,24.8 7.1,24.8 7.3,24.6 7.5,24.6 | 7.5,24.6 8.07,24.03 J1.MP1 8.07,19.98 7.8,19.7 7.8,11.14 J1.MP2 9.06,10.86 9.1,10.9 9.2,10.9 v9.4,10.7 | J1.17 10.05,15.15 9.4,15.8 9.4,19.1 9.95,19.65 J1.8 11.35,19.65 11.6,19.9 v11.7,19.9 | EPD_C12.1 1.9,7 EPD_C11.1 2.6,5.9 2.6,4.6 EPD_C10.1 3.9,3.1 6.1,3.1 6.25,3.25 | 6.25,3.25 6.7,3.7 EPD_C9.1 9,7.1 10.5,7.1 10.9,7.5 EPD_C8.1 11.75,8.75 | C29.2 8.65,3.25 6.25,3.25 | C30.2 32.2,8.37 U3.1 32.4,8.57 32.4,9 32.8,9.4 U3.9 33.4,9.4 | 33.4,9.4 33.75,9.05 U3.4 33.75,8.05 v34.2,7.6 | U3.6 33.4,10.24 33.4,9.4 | C18.1 19.3,16.6 18.84,17.05 C17.1 18.84,20.45 19.5,21.1 C6.2 C14.2 22.75,21.1 C12.2 23.13,20.72 C34.1 23.7,19.6 23.8,19.5 | C10.2 26.95,21.8 26.95,21.7 | 26.95,21.7 C16.2 | 26.95,21.7 27.55,21.1 C15.2 28.7,20.5 28.7,19.7 | 28.7,19.7 28.7,19.25 U1.P$B7 29.1,18.2 28.9,18 | X1.2 35.08,20.53 35.4,20.2 35.4,19.65 35.2,19.45 | 35.2,19.45 35.2,19.35 C1.2 35.85,18.6 C11.2 36.05,17.9 36.2,17.9 36.3,18 v36.7,18 36.2,17.5 33.45,17.5 U1.P$F23 | 35.2,19.45 35.2,20.1 33.9,21.4 33.85,21.4 X1.4 33.55,21.66 32.5,21.66 C2.2 32.45,21.76 v33.1,22.4 | R2-EP-DR.1 11,23.78 | 11,23.78 v11,23.9 | v8,24.6 7.5,24.6 | EPD_C7.1 15,10.9 14.4,10.3 13.1,10.3 v12.05,9.25 11.55,8.75 11.75,8.75 | EPD_C7.1 15.7,10.9 C25.2 17.6,11.4 18,11.4 C33.2 | IC9.C1 17.8,7.8 | 17.8,7.8 IC9.C2 IC9.C3 15.7,7.8 15.5,8 12.6,8 11.85,8.75 11.75,8.75 | 17.8,7.8 17.9,7.7 IC9.B1 18.1,7.4 18.45,7.05 | 17.9,3.6 C24.1 18.7,5 C23.1 19.21,5.32 19.3,5.4 19.3,5.9 18.9,6.3 18.9,6.6 18.45,7.05 | 17.9,3.6 18.7,2.8 C31.2 | 18.45,7.05 20.55,7.05 | 20.55,7.05 21.4,7.9 R9.1 22.07,8.23 C37.2 22.4,8.7 IC1.D2
  Top 0.15: 26.74,7.86 25.99,7.12 C27.1 | 26.74,7.86 25.99,7.86 25.62,8.23 25.22,8.23 24.85,8.6 C39.2 24.85,10.15 C21.2 | 26.74,7.86 27.04,7.86 R3.1 26.68,7.93 v25.8,8.8 | J4.SH4 18.68,31.2 | 18.68,31.2 J4.SH2 | 18.68,31.2 19.38,31.9 25.5,31.9 26.5,30.9 | 26.5,30.9 27.32,30.08 J4.SH3 | 26.5,30.9 26.5,32.88 J4.SH1 | J4.SH3 27.57,29.8 C43.2 | J4.SH4 18.3,29.18 17.5,29.18 R1_USB.1 16.48,29.38 v16.3,29.2 | J4.SH4 19.22,29.55 J4.A12_B1 20.02,28.75 R2_USB.2 19.82,27.9 19.2,27.9 19.1,27.8 v19.1,27.7 | J4.A1_B12 26.74,28.98 J4.SH3 | J4.SH3 27.32,28.48 28.1,27.7 28.1,27.3 27.3,26.5 D3.2 | EPD_C5.1 15.1,16.4 | 15.1,16.4 EPD_C6.1 15.1,11.7 EPD_C7.1 | v13.9,20.1 14,20.1 14.45,19.65 | EPD_C1.1 14.45,19.65 | 14.45,19.65 14.6,19.8 14.6,21.4 EPD_C2.1 | v16.15,16.25 16.05,16.15 15.35,16.15 15.1,16.4 | 11,23.78 10.9,23.88 10.9,26.2 12.26,27.56 SJ1.1 13.5,27.56 14.79,26.28 R_TYPE_SEL.1 14.8,27.1 v15.1,27.4 | v21.2,25.8 20.55,25.8 C1-EP-DR.2 | IC2.B3 39.3,8.2 39.85,7.65 | 39.85,7.65 TP_BAT_GND.TP 43.8,6.2 TP_GND.TP 44.8,7 v44.9,7 | IC2.B1 36.8,8.2 v36.7,8.3 | v39.2,7.6 39.25,7.65 39.85,7.65 | v39.3,9.5 C32.2 38.7,10.85 C8.2 C19.2 C7.2 | v34.8,16.3 35.9,16.3 35.95,16.25 C9.2 | C43.2 30.4,29.8 31.1,29.1 31.1,28.65 C42.2 | C43.2 28.86,29.8 29.93,30.87 | C22.2 31,31.6 | 31,31.6 30.66,31.6 29.93,30.87 | C4.2 30.97,30.87 29.93,30.87 | C3.2 31.24,31.84 31,31.6 | v31,21.4 31,20.96 C13.2 | IC3.9 IC3.8 27.95,10.63 27.7,10.38 v27.7,10 | 20.55,7.05 20.6,7 22.2,7 v22.7,6.5 | C20.2 C38.1 23.45,12.55 24.25,12.55 v24.6,12.2 | 28.9,18 U1.P$75 | U1.P$74 U1.P$80 U1.P$76 30.6,17.3 | U1.P$74 29.6,17.1 29.6,17.6 30.3,17.6 U1.P$81 | U1.P$74 31,16.1 32.5,17.6 U1.P$F23
  Top 0.15: U1.P$81 31.5,16.4 32.1,16.4 U1.P$82 U1.P$81 | U1.P$89 U1.P$85 U1.P$74 | U1.P$74 U1.P$90 | U1.P$74 U1.P$84 U1.P$83 | U1.P$74 30.6,14.9 U1.P$88 | U1.P$74 U1.P$87 | U1.P$74 28.9,17.8 28.9,18 | 30.6,17.3 U1.P$77 | U1.P$74 30.6,17.3 | U1.P$F23 32.7,17.6 U1.P$78 U1.P$74 | v29.2,20.2 28.7,19.7 | 23.8,19.5 24.8,18.5 C5.2 | v24.4,19.5 23.8,19.5 | v44.7,22.5 44.4,22.5 42.69,24.21 J2.5 J2.3 | v36.3,5.4 36,5.1 35.73,5.1 SW_UP.1 | SW_DN.1 13.67,4.5 14.1,4.5 14.2,4.4 v14.3,4.4 | v16.7,3.1 17.2,3.6 17.9,3.6 | v25.4,4.9 25.2,4.7 24.27,4.7 SW_NET.1 | U1.P$74 U1.P$81 | U1.P$74 31.8,16.1 U1.P$86
  Route2 0.15: v11,23.9 10.7,23.9 10,24.6 | 10,24.6 v8,24.6 | v9.4,10.7 10.4,10.7 11.85,9.25 v12.05,9.25 | v11.7,19.9 11.3,19.9 | 11.3,19.9 10.2,19.9 10,20.1 10,24.6 | 11.3,19.9 11.5,20.1 13.7,20.1 | 13.7,20.1 v13.9,20.1 | 13.7,20.1 14.3,19.5 14.3,18.1 v16.15,16.25 | v15.1,27.4 16,28.3 16,29.1 16.1,29.2 v16.3,29.2 | 39.05,7.45 38.8,7.2 37.4,7.2 36.7,7.9 36.7,8.4 36.6,8.3 | 39.05,7.45 v39.2,7.6 | 34.7,7.5 34.3,7.5 v34.2,7.6 | 34.7,7.5 35.5,7.5 35.7,7.7 35.7,8.2 36.5,8.2 36.6,8.3 | 39.05,7.45 39.05,8.75 39.5,9.2 39.5,9.3 | v39.3,9.5 39.5,9.3 | 39.5,9.3 39.7,9.5 39.7,13.1 36.5,16.3 36.3,16.3 | 36.3,16.3 v34.8,16.3 | 36.3,16.3 36.8,16.8 36.8,17.9 v36.7,18 | v33.1,22.4 32.7,22.4 32.3,22 31.5,22 31,21.5 v31,21.4 31.1,21.3 31.4,21.3 30.5,20.4 29.5,20.4 | v27.7,10 27.7,9.8 27.1,9.2 26.2,9.2 v25.8,8.8 25.5,8.8 24.9,8.2 | v22.7,6.5 23,6.5 | 23,6.5 24.2,6.5 24.4,6.7 24.4,7.7 24.9,8.2 | v24.6,12.2 24.85,11.95 | 24.85,11.95 24.9,11.9 24.9,8.2 | 29.5,20.4 29.3,20.4 29.2,20.3 v29.2,20.2 | 29.5,20.4 28.6,19.5 25,19.5 | 25,19.5 v24.4,19.5 | v44.9,7 45.4,7.5 45.4,21.5 44.7,22.2 v44.7,22.5 | 24.85,11.95 24.85,13.35 23.3,14.9 23.3,17.8 25,19.5 | 36.6,8.3 v36.7,8.3 | v36.3,5.4 36.3,5.6 34.55,7.35 34.7,7.5 | v14.3,4.4 15.5,4.4 16.7,3.2 v16.7,3.1 | 23,6.5 24.5,5 25.3,5 v25.4,4.9
  Bottom 0.15: v19.1,27.7 20.5,26.3 21.1,26.3 21.2,26.2 v21.2,25.8
  Bottom 0.3: U1.P$79 U1.P$75
  pour Route2: 7.06,10.56 7.04,10.54 7.02,10.52 0.08,10.52 0.08,7 0.12,6.22 0.25,5.46 0.46,4.71 0.76,4 1.14,3.32 1.59,2.68 2.1,2.1 2.68,1.59 3.32,1.14 4,0.76 4.71,0.46 5.46,0.25 6.22,0.12 7,0.08 9.52,0.08 9.52,1.82 9.54,1.84 9.56,1.86 9.58,1.88 14.42,1.88 14.44,1.86 14.46,1.84 14.48,1.82 14.48,0.08 20.52,0.08 20.52,1.82 20.54,1.84 20.56,1.86 20.58,1.88 25.42,1.88 25.44,1.86 25.46,1.84 25.48,1.82 25.48,0.08 31.52,0.08 31.52,1.82 31.54,1.84 31.56,1.86 31.58,1.88 36.42,1.88 36.44,1.86 36.46,1.84 36.48,1.82 36.48,0.08 39,0.08 39.78,0.12 40.54,0.25 41.29,0.46 42,0.76 42.68,1.14 43.32,1.59 43.9,2.1 44.41,2.68 44.86,3.32 45.24,4 45.54,4.71 45.75,5.46 45.88,6.22 45.92,7 45.92,28.2 45.88,28.99 45.75,29.76 45.53,30.52 45.23,31.25 44.85,31.94 44.39,32.58 43.87,33.17 43.28,33.69 42.64,34.15 41.95,34.53 41.22,34.83 40.46,35.05 39.69,35.18 38.9,35.22 7.3,35.22 6.49,35.18 5.69,35.04 4.91,34.82 4.17,34.51 3.46,34.12 2.8,33.65 2.19,33.11 1.65,32.5 1.18,31.84 0.79,31.13 0.48,30.39 0.26,29.61 0.12,28.81 0.08,28 0.08,24.48 7.02,24.48 7.04,24.46 7.06,24.44 7.08,24.42 7.08,10.58
HAPTIC_EN  (via drill 0.15)
  Top 0.15: U1.P$U1 27.3,14.8 26.8,14.8 v26.7,14.7 | v36.6,8.8 37.1,8.8 IC2.A1
  Bottom 0.15: v26.7,14.7 26.7,13.9 25.8,13 25.8,11.3 26.1,11 26.1,9.1 26.9,8.3 26.9,7.7 29.7,7.7 30,8 35.8,8 v36.6,8.8
IMU_INT1  (via drill 0.15)
  Top 0.15: IC3.5 29.05,9.45 v29.1,9.5 | U1.P$N1 26.25,15.85 25.75,15.35 25.75,13.8 27.1,13.8 v27.3,13.6
  Bottom 0.15: v27.3,13.6 27.3,12.1 28.2,11.2 28.6,11.2 29.3,10.5 29.3,9.8 29.1,9.6 v29.1,9.5
IMU_INT2  (via drill 0.15)
  Top 0.15: IC3.6 28.52,10 28.9,10 28.9,11 27.9,12 26.8,12 v25.7,10.9 | v25,13.8 24.2,14.6 24.2,14.8 v24,15
  Bottom 0.15: U1.P$P2 24.9,15.6 24.3,15 v24,15 | v25.7,10.9 25,11.6 v25,13.8
  other vias: 27.85,15.6
LX1
  Top 0.15: IC9.B2 IC9.B3 14.73,7.4 L7.1
LX2
  Top 0.15: IC9.D2 IC9.D3 16.2,8.2 15.27,9.13 L7.2
MOSI  (via drill 0.15)
  Top 0.15: v11.8,16.8 11.65,16.65 J1.14
  Bottom 0.15: U1.P$B13 30.6,22.3 29.2,23.7 27.5,23.7 27,24.2 23.8,24.2 23.1,23.5 18.8,23.5 18.7,23.6 17.9,23.6 16.8,22.5 16.8,18.5 15.9,17.6 12.5,17.6 12.3,17.4 12.3,17 12.1,16.8 v11.8,16.8
  other vias: 30.6,18.85
N$1
  Top 0.15: C39.1 23.35,9.6 IC1.B2
N$2
  Top 0.15: U1.P$C1 26.75,18.35 26.6,18.5 C5.1
N$3
  Top 0.15: IC9.D1 18,8.1 R4.2
N$4
  Top 0.15: IC9.E1 R2.2
N$5
  Top 0.15: U1.P$D2 27.75,18 24.8,18 23.4,19.4 20.3,19.4 20.2,19.3 | 20.2,19.3 19.95,19.05 X2.1 | C17.2 19.6,19.9 20.2,19.3
N$6
  Top 0.15: R9.2 21.43,8.8 IC1.D1
N$7
  Top 0.15: 32.45,30.75 L1.2 34,30.9 36.4,33.3 ANT1.1 | 32.45,30.75 32.4,30.7 C4.1 | C22.1 32.45,30.8 32.45,30.75
N$8
  Top 0.15: J1.20 11.75,13.65 12.2,13.2 12.2,10.3 10.7,8.8 10,8.8 EPD_C8.2
N$9
  Top 0.15: U1.P$B3 27.65,19.3 27.4,19.3 26.8,19.9 25.7,19.9 25.2,20.4 L2.1
N$10
  Top 0.15: IC3.1 26.95,8.63 R3.2
N$11  (via drill 0.15)
  Top 0.15: U1.P$B5 27.15,20.3 26.8,20.3 26.45,20.66 C16.1 26.24,21 C10.1 25.9,22.35 25.9,22.5 | 25.9,22.5 25.9,23.1 L3.2 | 25.9,22.5 26.1,22.7 27.7,22.7 C15.1 28.5,22.3 29.3,21.5 v29.6,21.5 | v30.1,22.1 30.7,22.7 v30.8,22.7 | v34.5,17.9 34.45,17.85 U1.P$E24
  Bottom 0.15: v29.6,21.5 29.6,21.6 v30.1,22.1 | v34.5,17.9 34.5,18.8 30.9,22.4 30.9,22.6 v30.8,22.7
N$12
  Top 0.15: L3.1 25,22.1 L2.2
N$13
  Top 0.15: U1.P$F2 27.6,17.6 27.5,17.7 23.3,17.7 | 23.3,17.7 22.95,17.7 X2.2 | 23.3,17.7 22.55,16.96 C18.2
N$14
  Top 0.15: D5.2 6.45,30.65 7.3,31.5 C2-EP-DR.2 7.7,32.8 9.41,32.8 L5.1 10.31,29.79 10.4,29.7 10.4,28.1 10.9,27.6 Q3.3
N$15
  Top 0.15: D4.2 D2.1 3.8,32.8 4.2,33.2 C2-EP-DR.1
N$16
  Top 0.15: J1.4 13.05,21.65 EPD_C2.2
N$17
  Top 0.15: R1-EP-DR.1 14.8,25.3 | 14.8,25.3 R_TYPE_SEL.2 | SJ1.2 14.06,26.04 14.8,25.3
N$18
  Top 0.15: J1.24 10.4,11.33 10.4,10.5 10,10.1 4.5,10.1 EPD_C12.2
N$19
  Top 0.15: U1.P$N24 35.39,15.85 C9.1
N$20
  Top 0.15: J1.5 11.65,21.15 13.2,19.6 EPD_C1.2
N$21
  Top 0.15: U1.P$AC5 28.5,13.35 28.35,13.2 28.2,13.2 27.5,13.2 27.1,12.8 24.6,12.8 C20.1
N$22  (via drill 0.15)
  Top 0.15: R1_USB.2 17.6,28.53 17.6,28 18.3,27.3 21.3,27.3 21.5,27.5 v23,27.5 | v25,27.9 24.8,27.9 24.6,28.1 24.5,28.1 24.25,28.35 J4.A5
  Bottom 0.15: v23,27.5 23.2,27.7 24.8,27.7 v25,27.9
N$23  (via drill 0.15)
  Top 0.15: U1.P$H23 33.45,17.2 37.5,17.2 v37.8,17.5 | C3.1 32.35,31.9 L1.1 33.3,31.9 33.6,31.6 v33.6,31.3
  Bottom 0.15: v33.6,31.3 33.6,26.6 36.8,23.4 36.8,19 37.6,18.2 37.6,17.7 v37.8,17.5
N$25
  Top 0.15: J1.22 11.45,12.65 11.6,12.5 11.6,10.7 10.4,9.5 7.3,9.5 4.9,7.1 4.9,5.1 EPD_C10.2
N$26
  Top 0.15: U1.P$D23 33.55,18.3 35.14,18.3 C11.1
N$27
  Top 0.15: U1.P$B24 34.2,18.85 C1.1 34.5,19.3 33.58,20.23 X1.1
N$28
  Top 0.15: U1.P$A23 33.35,19.55 32.4,20.5 C2.1 32.25,21.25 31.9,21.6 31.9,22.1 32.7,22.9 35,22.9 35.02,22.88 X1.3
N$29
  Top 0.15: IC2.A2 37.5,8.9 C32.1
N$31
  Top 0.15: U1.P$A18 31.85,19.6 C13.1
N$34
  Top 0.15: R2_USB.1 21.25,28.38 J4.B5
N$36
  Top 0.15: J1.18 12.15,14.65 12.6,14.2 13.2,14.2 EPD_C6.2
N$37
  Top 0.15: J1.19 11.95,14.15 12.6,13.5 12.6,12.2 EPD_C7.2
OUT+
  Top 0.15: IC2.A3 39.9,8.7 40.7,7.9 43.7,7.9 TP_OP.TP
OUT-
  Top 0.15: IC2.C3 39.4,6.5 39.4,5.8 40.3,4.9 41.1,4.9 TP_ON.TP
P0.13  (via drill 0.15)
  Top 0.15: C30.1 33.4,6.53 34.3,6.53 | 34.3,6.53 R5.1 | 34.3,6.53 34,6.23 34,5.9 33.8,5.7 33.1,5.7 v33,5.6 33,5.2 32.6,4.8 SW_UP.2 | v30.8,6.3 31.6,7.1 31.6,9.1 v31.9,9.4 | U1.P$AD8 29.35,12.05 29.6,11.8 v31.9,11.8
  Bottom 0.15: v33,5.6 33.25,5.85 33.1,6 31.1,6 v30.8,6.3 | v31.9,11.8 31.9,11.3 31.8,11.2 31.8,9.8 31.9,9.7 v31.9,9.4
P0.14  (via drill 0.15)
  Top 0.15: R8.1 19.8,5.3 | 19.8,5.3 19.8,4.8 19.5,4.5 C31.1 | 19.8,5.3 20.1,5.6 20.1,5.8 20.4,6.1 20.6,6.1 | 20.6,6.1 24.4,6.1 25,5.5 26.6,5.5 27.6,6.5 28.4,6.5 30.2,8.3 v30.2,8.7 | SW_NET.2 21.4,5.3 20.6,6.1
  Bottom 0.15: U1.P$AC9 29.3,13.05 29.3,10.9 30.4,9.8 30.4,8.9 v30.2,8.7
  other vias: 29.6,13.35
P1.01  (via drill 0.15)
  Top 0.15: Q1.1 17.15,26.55 17.2,26.6 21.9,26.6 22.3,27 23.2,27 23.4,26.8 23.4,26.1 23.32,26.03 R_PWR_EPD.1 22.6,25.83 22.6,25.5 22.7,25.4 v22.7,25.1
  Bottom 0.15: U1.P$Y23 34.7,14.1 37.3,16.7 37.3,17.9 36,19.2 36,22.8 36.45,23.25 35.2,24.5 23.4,24.5 22.8,25.1 v22.7,25.1
  other vias: 33.35,14.1
P1.02  (via drill 0.15)
  Top 0.15: U1.P$W24 35.55,14.35 35.6,14.4 v36.1,14.4 | v15.6,2.1 15,2.1 14.6,2.5 14.6,3.5 14.9,3.8 14.9,5.6 12.9,5.6 12.4,6.1 9.57,6.1 R7.1 8.9,5.43 C29.1 8.97,4.77 SW_DN.2
  Bottom 0.15: v36.1,14.4 42.3,14.4 42.3,8 36.6,2.3 31.5,2.3 31.2,2 26.1,2 25.5,2.6 15.8,2.6 15.7,2.5 15.7,2.2 v15.6,2.1
PMIC_INT  (via drill 0.15)
  Top 0.15: IC1.A1 21.6,10.5 21.6,14 22.5,14.9 23.1,14.9 23.6,15.4 24.7,15.4 v25.1,15
  Bottom 0.15: U1.P$T2 25.2,15.1 v25.1,15
  other vias: 27.85,15.1
PREVGH
  Top 0.15: D5.1 5.1,26.45 5.1,26.1 5.6,25.6 8.7,25.6 9.2,25.1 9.2,23.4 8.7,22.9 8.7,14.4 9.95,13.15 J1.21 11.55,13.15 11.9,12.8 11.9,10.5 10.6,9.2 7.4,9.2 6.6,8.4 6.6,6.7 EPD_C9.2
PREVGL
  Top 0.15: D2.2 3.8,25.1 8.2,25.1 8.8,24.5 8.8,23.5 8.5,23.2 8.4,23.2 8.4,14.1 10.35,12.15 J1.23 11.25,12.15 11.3,12.1 11.3,11 10.1,9.8 5.4,9.8 5.2,9.6 5.2,7.8 4.2,6.8 EPD_C11.2
RESE
  Top 0.15: J1.3 11.75,22.15 11.9,22.3 11.9,24.5 11.55,24.85 Q3.2 11.9,25.1 12.2,25.1 12.5,24.8 12.5,24.6 12.67,24.43 R1-EP-DR.2
RESET  (via drill 0.15)
  Top 0.15: J2.6 42.69,26.19 43.9,27.4 44.9,27.4 45.6,26.7 45.6,9.9 45.3,9.6 44.9,9.6 | 44.9,9.6 41.9,9.6 TP_RESET.TP | v31.2,8.6 31.2,8 30.4,7.2 v30.3,7.2 | v37.2,3.6 37.2,1.4 37.7,0.9 41.3,0.9 42.3,1.9 43.1,1.9 44.4,3.2 44.4,4.8 45.5,5.9 45.5,9 44.9,9.6
  Bottom 0.15: U1.P$AC13 31,12.95 31,10.8 31.3,10.5 31.3,9.4 31.5,9.2 31.5,8.7 31.4,8.6 v31.2,8.6 | v30.3,7.2 30.15,7.05 30.15,6.75 27.65,4.25 27.65,3.95 28.9,2.7 30,2.7 31.5,4.2 36.5,4.2 37.1,3.6 v37.2,3.6
  other vias: 30.6,13.35
SCK  (via drill 0.15)
  Top 0.15: U1.P$A12 30.35,21.35 28.7,23 28.7,23.4 28.6,23.5 27.4,23.5 27,23.9 23.9,23.9 23.3,23.3 19.1,23.3 17.3,21.5 v17.3,17.6 | v16.5,16.9 16.2,16.9 15.8,17.3 11.8,17.3 11.6,17.1 10.77,17.1 J1.13
  Bottom 0.15: v17.3,17.6 17.3,17.4 16.8,16.9 v16.5,16.9
SCL  (via drill 0.15, 0.35)
  Top 0.15: R4.1 19.3,8.1 19.6,7.8 v19.8,7.8 | v20.6,8.9 20.32,8.63 R17.2 | IC3.12 26.15,9.45 v25.4,10.2 | 21.7,9.8 21.9,9.6 IC1.B1 | v21.7,9.9 21.7,9.8 | 35.8,7.9 37,7.9 IC2.C1 37.2,6.4 37.8,5.8 37.9,5.8 38.7,5 38.7,2.8 TP_SCL.TP | v34.6,9.7 34.6,8.3 34.7,8.2 35.5,8.2 35.8,7.9 | v32.9,11.1 32.75,10.95 U3.7 | v20.5,15.1 19.7,14.3 19.7,10.2 19.9,10 21.1,10 21.15,10.05 21.45,10.05 21.7,9.8 | v36.3,7.6 36.1,7.6 35.8,7.9
  Bottom 0.15: U1.P$M2 26.6,16.1 26.5,16 23.8,16 23.3,15.5 23.3,15.4 23.2,15.3 20.7,15.3 v20.5,15.1 | v19.8,7.8 19.9,7.9 20.1,7.9 20.6,8.4 v20.6,8.9 20.6,9 21.5,9.9 v21.7,9.9 22.9,9.9 24,11 25.1,11 25.4,10.7 v25.4,10.2 25.4,8.7 27.6,6.5 28.7,6.5 29,6.8 29,7.1 29.3,7.4 29.8,7.4 30.1,7.7 33.4,7.7 34,7.1 34.3,7.1 34.8,7.6 v36.3,7.6 | v34.6,9.7 34.6,11.1 v32.9,11.1
  other vias: 27.85,16.1
SDA  (via drill 0.15)
  Top 0.15: U1.P$L1 26.35,16.35 26.2,16.2 23.6,16.2 23.1,15.7 20.4,15.7 19.3,14.6 19.3,10 19.6,9.7 20.7,9.7 | 20.7,9.7 21.2,9.7 21.7,9.2 IC1.C1 | R18.2 19.47,8.6 19.4,8.6 | 19.4,8.6 R2.1 | 19.4,8.6 19.8,8.2 20.4,8.2 | 20.4,8.2 20.8,8.2 21,8.4 21,9.4 20.7,9.7 | 20.4,8.2 20.8,7.8 20.8,7.7 v20.7,7.7 | 27.5,7.2 26.9,6.6 v26.4,6.6 | 27.5,7.2 27.5,8.88 IC3.2 | v32.3,11.1 32.25,11.05 U3.8 30.96,9.1 29.6,9.1 29.3,8.8 29.3,8.2 28.4,7.3 27.6,7.3 27.5,7.2 | v26.2,4.2 26.7,3.7 26.7,3.5 27.6,2.6 TP_SDA.TP
  Bottom 0.15: v20.7,7.7 21.3,7.1 24.7,7.1 25.9,5.9 26,5.9 | v26.4,6.6 26.1,6.6 26,6.5 26,5.9 | v32.3,11.1 32.3,11.3 32.5,11.5 34.8,11.5 35.1,11.2 35.1,9.7 35.5,9.3 36.9,9.3 37.4,8.8 37.4,8.5 IC2.B2 | 26,5.9 26,4.4 v26.2,4.2
  other vias: 37.7,8.2
SWDCLK  (via drill 0.15)
  Top 0.15: U1.P$AA24 35.75,13.85 35.8,13.8 v36.2,13.8 | v37.4,13.8 38.9,13.8 v38.9,16 | v41.7,18.3 41.95,18.55 | 41.95,18.55 42.6,19.2 TP_SWDCLK.TP | 41.95,18.55 40.85,18.55 40,17.7 39,17.7 36.5,20.2 36.5,24.8 35.4,25.9 35.4,28.7 36.1,29.4 40.2,29.4 40.5,29.1 40.5,26.9 41.42,25.98 J2.4
  Bottom 0.15: v36.2,13.8 v37.4,13.8 | v38.9,16 39.9,16 41.7,17.8 v41.7,18.3
SWDIO  (via drill 0.15)
  Top 0.15: U1.P$AC24 35.95,13.35 36,13.3 v36.1,13.3 | v37.4,13.3 39.7,13.3 v39.7,15.4 | v42,15.4 42.3,15.7 42.6,15.7 42.8,15.9 42.8,16.8 | 42.8,16.8 TP_SWDIO.TP | J2.2 39.66,25.84 39.4,26.1 37.6,26.1 37.2,25.7 37.2,24.5 36.85,24.85 36.85,20.25 39,18.1 39.8,18.1 40.7,19 41.2,19 41.2,20.4 41.8,21 43.2,21 43.9,20.3 43.9,17.9 42.8,16.8
  Bottom 0.15: v36.1,13.3 v37.4,13.3 | v39.7,15.4 v42,15.4
SWO  (via drill 0.15)
  Top 0.15: U1.P$AD22 32.85,11.95 33,11.8 35.4,11.8 35.4,12.7 v35.6,12.9 | v41.6,13.4 42.6,14.4 TP_SWO.TP
  Bottom 0.15: v35.6,12.9 40.9,12.9 41.4,13.4 v41.6,13.4
VBAT  (via drill 0.15)
  Top 0.15: U3.3 33.25,8.1 | 33.25,8.1 33.25,7.75 v32.8,7.3 | v31.2,7.3 31.2,7.2 30.4,6.4 30.4,4.9 29.7,4.2 29.2,4.2 TP_VBAT.TP 28.7,5.7 28.4,6 27.9,6 v27.8,6.1 | U3.2 32.94,8.42 33.25,8.1 | IC1.C2 22.7,9.2 22.9,9 22.9,8.6 C37.1 24.68,7.9 C27.2 25.31,7.7 25.6,7.7 v25.8,7.5
  Bottom 0.15: v32.8,7.3 32.7,7.3 32.2,6.8 31.5,6.8 31.2,7.1 v31.2,7.3 | v25.8,7.5 26.1,7.5 27.5,6.1 v27.8,6.1
VBUS  (via drill 0.15, 0.35)
  Top 0.3: 23.2,10.6 23.2,11.3 C38.2 24,11.5 25.7,11.5 26.6,12.4 27.6,12.4 27.85,12.65 U1.P$AD2 | 23.2,10.6 C21.1 | IC1.A2 22.8,10.3 | 22.8,10.3 23.1,10.6 23.2,10.6 | J4.A9_B4 20.6,29.48 21.1,29.98 21.1,30.8 21.4,31.1 23.8,31.1 25.3,29.6 25.3,29.08 J4.A4_B9 25.4,28.4 v25.7,28.1 | C43.1 30.2,28.6 | 30.2,28.6 C42.1 | 30.2,28.6 30.9,27.9 30.9,27 30.4,26.5 D3.5 28.7,26.5 v28.4,26.8 | 22.8,10.3 22.4,10.7 v22.3,10.6 | v18.2,12.8 18,13 18,14.4 18.6,15 v18.6,15.4 | v17.4,22.3 16.55,23.15 v16.45,23.05
  Bottom 0.3: v28.4,26.8 27.9,27.3 27.9,28 27.8,28.1 v25.7,28.1 26.2,27.6 26.2,26.9 25.5,26.2 23,26.2 20.9,24.1 17.5,24.1 v16.45,23.05 | v22.3,10.6 20.4,12.5 18.5,12.5 v18.2,12.8 | v18.6,15.4 18.4,15.6 18.4,18.8 17.4,19.8 v17.4,22.3
VREG
  Top 0.3: C24.2 17.5,5 16.8,5 | 16.8,5 16,4.2 16,2.6 TP_VREG.TP | 16.8,5 17.48,5.69 18,5.69 | 18,5.69 C23.2 | 18,5.69 17.49,6.19 | 17.49,6.19 17.1,6.59 IC9.A3 | IC9.A2 17.5,6.8 | 17.5,6.8 17.5,6.2 17.49,6.19 | IC9.A1 17.7,6.8 17.5,6.8
(copper drawn outside any net)
  shapes: Bottom area x1, Route2 area x1